# EAGLE board relay (EAGLE 8.7.1)
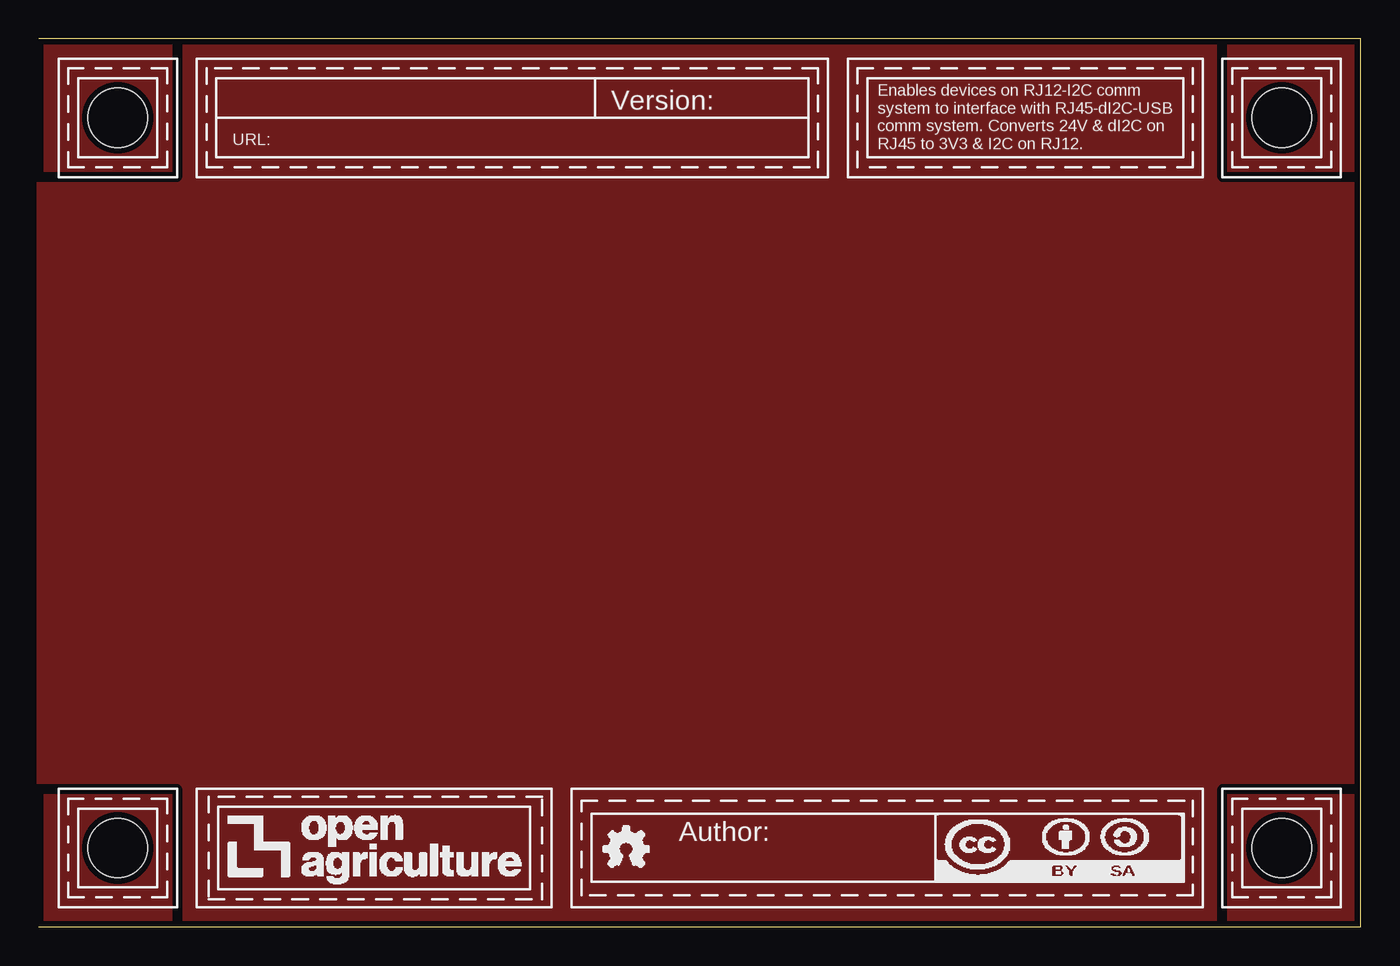
[diagram p0: board, top side]
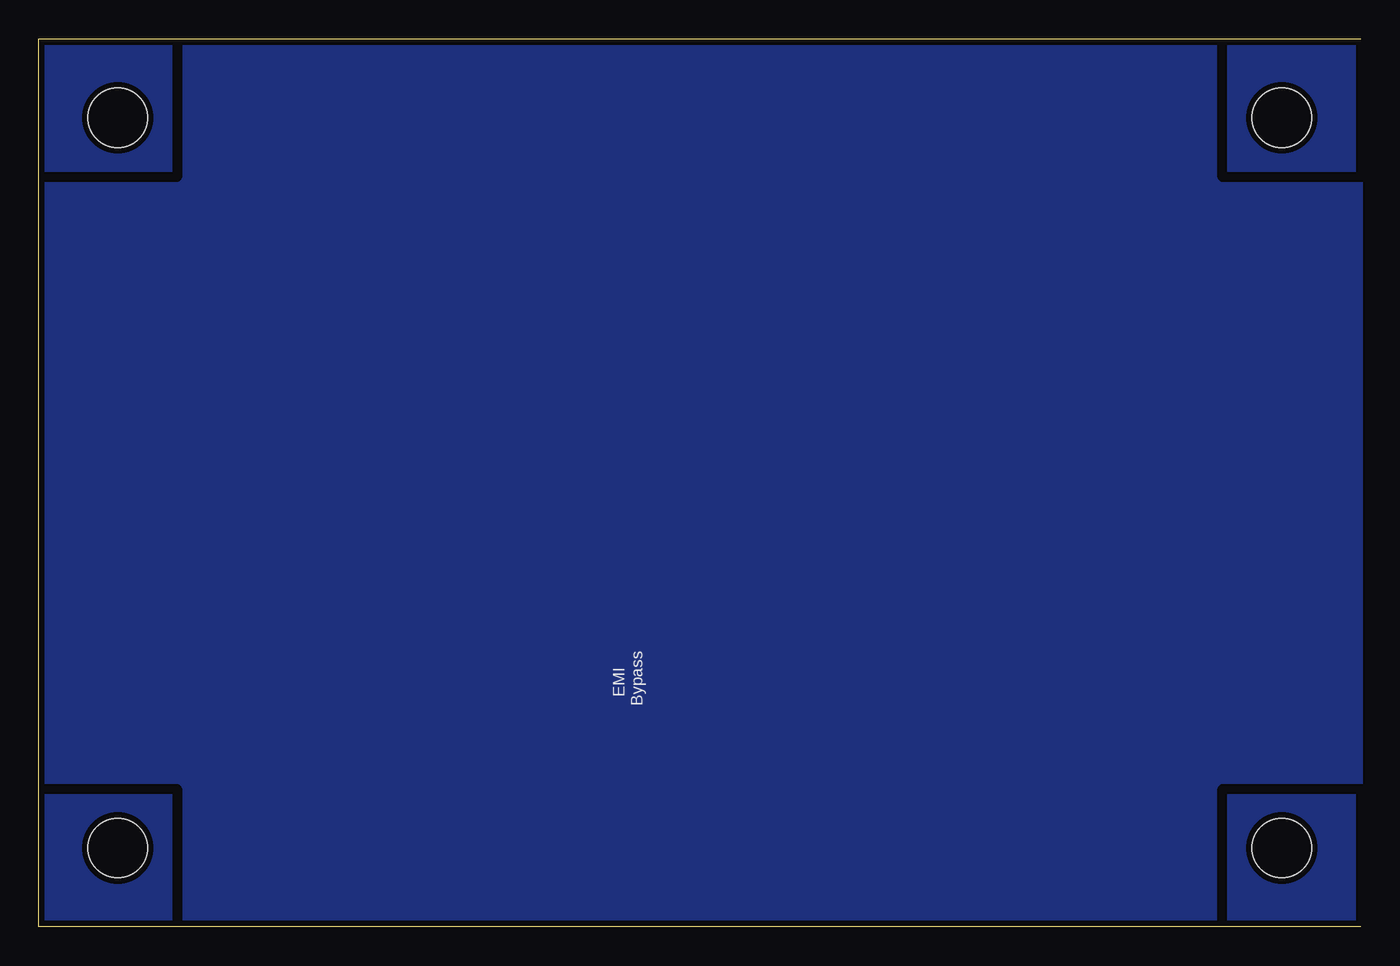
[diagram p1: board, bottom side, seen from below]

Size 85.09 x 57.15 mm. Coordinates in mm from the lower left corner, seen from the top.
Outline: 0,0 85.09,0 85.09,57.15 0,57.15
Copper layers (1*16): Top 0.035559375mm / dielectric 1.6mm / Bottom 0.035559375mm
Design rules "oshpark-2layer-mask": minimum track width 6mil, minimum drill 10mil, track to track 6mil, track to pad 6mil, pad to pad 6mil, via to via 6mil, smd to smd 6mil, copper to edge 15mil, drill to drill 6mil, minimum pad ring 5mil, minimum via ring 5mil, stop-mask expansion 2.5mil, vias tented up to drill 20mil, thermal gap 10mil
tRestrict: 2 lines

## Footprints (pad centres in the part's own frame; a part is rotated, then mirrored left to right if it is on the bottom)
C0805 = smd 1.3 x 1.5: 1 -0.95,0; 2 0.95,0
C0603 = smd 1.1 x 1: 1 -0.85,0; 2 0.85,0
POWERDI123 = smd 1.05 x 1.5: + -1.3,0 | smd 2.4 x 1.5: - 1.05,0
CHIPLED_0603 = smd 0.8 x 0.8: A 0,-0.75; C 0,0.75
GSH15 = drill 1.321 pad 2.54 long: 1 -7.62,0; 2 7.62,0 | hole 2.794: 0,0
RC0603N = smd 0.756 x 0.8: 1 -0.778,0; 2 0.778,0
RELAY_G5LE-1 = drill 1.524 pad 2.032 square: 1 0,17.424 | drill 1.524 pad 2.032: 2 -5.994,15.418; 3 -5.994,3.2; 4 5.994,3.2; 5 5.994,15.418
B2,54 = smd 2.54 x 2.54: TP 0,0
TP06R = smd 0.6 x 0.6: TP 0,0
CORNER = hole 3.81: 0,0
LTV-355T = smd 0.8 x 1: N1 -1.27,-3.25; N2 1.27,-3.25; N3 -1.27,3.25; N4 1.27,3.25

## Placement (x,y rotation side)
C3  10uF  [C0805]  -36.83,20.07 0 top  (outside the outline)
C5  0.1uF  [C0603]  -28.26,27.94 180 top  (outside the outline)
D1  SBR2A40P1-7  [POWERDI123]  -44.45,-6.03 0 top  (outside the outline)
D2  APT1608  [CHIPLED_0603]  -29.97,9.33 270 top  (outside the outline)
F1  [GSH15]  -60.96,-19.68 90 top  (outside the outline)
R1  100  [RC0603N]  -29.65,6.73 0 top  (outside the outline)
R2  100  [RC0603N]  -49.21,4.76 270 top  (outside the outline)
RELAY_1  G5LE-14_DC12  [RELAY_G5LE-1]  -45.72,-29.21 0 top  (outside the outline)
TP1  PTR1B2,54  [B2,54]  -64.45,16.19 0 top  (outside the outline)
TP3  TPTP06R  [TP06R]  -46.67,49.47 270 top  (outside the outline)
TP12  PTR1B2,54  [B2,54]  -69.53,15.88 0 top  (outside the outline)
TP27  TPTP06R  [TP06R]  -30.23,43.62 270 top  (outside the outline)
TP28  TPTP06R  [TP06R]  -38.48,43.37 270 top  (outside the outline)
U$1  [CORNER]  5.08,5.08 0 top
U$2  [CORNER]  5.08,52.07 270 top
U$3  [CORNER]  80.01,52.07 180 top
U$4  [CORNER]  80.01,5.08 90 top
U$5  [LOGO]  10.16,1.27 0 top
U$6  AUTHOR  [AUTHOR]  34.29,1.27 0 top
U$7  TITLE  [TITLE]  10.16,48.26 0 top
U$9  LTV-355T  [LTV-355T]  -50.48,-2.86 180 top  (outside the outline)

## Library data of the parts
C3 = openag-capacitors; MANUFACTURER: Taiyo Yuden; MPN: GMK212BBJ106KG-T; VENDOR: Digikey; VLINK: https://www.digikey.com/product-detail/en/taiyo-yuden/GMK212BBJ106KG-T/587-4893-1-ND/6563736; VPN: 587-4893-1-ND
C5 = openag-capacitors; MANUFACTURER: Kemet; MPN: C0603C104K5RACTU; VENDOR: Digikey; VLINK: https://www.digikey.com/product-detail/en/kemet/C0603C104K5RACTU/399-5089-1-ND/1465623; VPN: 399-5089-1-ND
D1 = openag-diodes; MANUFACTURER: Diodes Incorporated; MPN: SBR2A40P1-7; VENDOR: Digikey; VLINK: https://www.digikey.com/product-detail/en/diodes-incorporated/SBR2A40P1-7/SBR2A40P1DITR-ND/1681825; VPN: SBR2A40P1DITR-ND
D2 = openag-diodes; MANUFACTURER: Kingbright; MPN: APT1608CGCK; VENDOR: Digikey; VLINK: https://www.digikey.com/product-detail/en/kingbright/APT1608CGCK/754-1116-1-ND/1747833#; VPN: 754-1116-1-ND
F1 = fuse; MPN: 64900001039; OC_FARNELL: 1271673; OC_NEWARK: 02P0318
R1 R2 = openag-resistors; MANUFACTURER: Yageo; MPN: RC0603JR-07100RL; VENDOR: Digikey; VLINK: https://www.digikey.com/product-detail/en/yageo/RC0603JR-07100RL/311-100GRCT-ND/729644; VPN: 311-100GRCT-ND
RELAY_1 = relay_2; MANUFACTURER_PART_NUMBER: G5LE14 DC12; VENDOR: OMRON
TP1 TP12 = testpad
TP3 TP27 TP28 = openag-testpads; MPN: N/A
U$1-U$5 = openag-frames
U$6 = openag-frames; AUTHOR: Dan Poitrast; MPN: N/A
U$7 = openag-frames; MPN: N/A; TITLE: LED-DRV; URL: github.com/openaginitiative/openag-body/prj/usb-hub; VER: 1.0
U$9 = openag-transistors

## Nets
24V_EMI: R1.2
+5V: TP27.TP
+24V: C3.1 D1.- RELAY_1.5 TP3.TP
GND: C3.2 D2.C TP28.TP U$9.N2 U$9.N3
N$4: RELAY_1.3
N$5: D1.+ RELAY_1.2 U$9.N4
N$6: D2.A R1.1
N$11: F1.2 RELAY_1.1
N$27: R2.2 U$9.N1
N$31: R2.1

## Tracks (layer width: path | path; a pad name or v marks a point on that pad's centre or on a via)
+24V  (3 unrouted)
  pour Top (isolate 0.406): -43.5,42.86 -47.31,42.86 -47.31,58.1 -43.5,58.1
GND  (via drill 0.35)  (13 unrouted)
  other vias: -24.7,24.26 -24.07,24.51 -24.7,24.89 -24.07,25.27 -24.07,25.91 -24.7,25.53 -24.7,26.16 -24.07,26.54 -24.7,26.8
  pour Top (isolate 0.305, rank 3): 0,0 85.09,0 85.09,57.15 0,57.15
  pour Bottom (isolate 0.305, rank 3): 0,0 85.09,0 85.09,57.15 0,57.15
  pour Top (isolate 0.305, rank 2): -18.1,42.86 -47.31,42.86 -47.31,58.1 -18.1,58.1
  pour Bottom (isolate 0.406, rank 2): -18.1,58.1 -47.31,58.1 -47.31,42.86 -18.1,42.86
LED-
  pour Top (isolate 0.254): -15.24,25.4 -22.86,25.4 -23.5,26.04 -23.5,27.62 -27.94,27.62 -27.94,28.57 -15.24,28.57
LX
  pour Top (isolate 0.254): -15.24,23.5 -26.04,23.5 -26.35,23.18 -26.35,19.05 -15.24,19.05
N$5  (2 unrouted)
N$6  (1 unrouted)
N$11  (1 unrouted)
N$27  (1 unrouted)

## Text on the board
tPlace: GND | 24V | Enables devices on RJ12-I2C comm / system to interface with RJ45-dI2C-USB / comm system. Converts 24V & dI2C on / RJ45 to 3V3 & I2C on RJ12. | GND | 5V | 4.5-40V 1.5A LED Driver / w/Optional EMI Filter + Indicator LED
bPlace: EMI / Bypass